# EAGLE board USB Experiment Board (EAGLE 7.6.0)

Size 39 x 45 mm. Coordinates in mm from the lower left corner, seen from the top.
Outline: 0,0 39,0 39,45 0,45 0,0
Copper layers (1*16): Top 0.035mm / dielectric 1.5mm / Bottom 0.035mm
Design rules "default": minimum track width 10mil, minimum drill 24mil, track to track 8mil, track to pad 8mil, pad to pad 8mil, via to via 8mil, smd to smd 8mil, copper to edge 40mil, drill to drill 8mil, minimum pad ring 10mil, minimum via ring 8mil, stop-mask expansion 4mil, vias tented up to drill 0mil, thermal gap 10mil

## Footprints (pad centres in the part's own frame; a part is rotated, then mirrored left to right if it is on the bottom)
1X10-BIG = drill 1.016 pad 1.778 octagon: 1 -11.43,0; 2 -8.89,0; 3 -6.35,0; 4 -3.81,0; 5 -1.27,0; 6 1.27,0; 7 3.81,0; 8 6.35,0; 9 8.89,0; 10 11.43,0
1X02 = drill 1.016 long: 1 -1.27,0; 2 1.27,0
1206 = smd 1.6 x 1.803: A -1.422,0; C 1.422,0
1X04 = drill 1.016 long: 1 -3.81,0; 2 -1.27,0; 3 1.27,0; 4 3.81,0
SIP10 = drill 0.6 long: 1 -11.46,0; 2 -8.92,0; 3 -6.38,0; 4 -3.84,0; 5 -1.3,0; 6 1.24,0; 7 3.78,0; 8 6.32,0; 9 8.86,0; 10 11.4,0
USB-FEMALE-A-PTH = drill 0.9: D+ 5.9,1.3; D- 7.9,1.3; GND 3.4,1.3; VBUS 10.4,1.3 | drill 3: GND@1 13.5,4; GND@2 0.3,4
MOLEX_480371000 = smd 1.2 x 2: 1 3.5,2.6; 2 1,2.6; 3 -1,2.6; 4 -3.5,2.6 | drill 2.5: M1 -5.7,0; M2 5.7,0 | hole 1.1: -2.25,0; 2.25,0

## Placement (x,y rotation side)
BB_1  PINHD-1X10  [1X10-BIG]  19.5,9.5 0 top
BB_2  PINHD-1X10  [1X10-BIG]  19.5,12 0 top
BB_3  PINHD-1X10  [1X10-BIG]  19.5,14.5 0 top
BB_4  PINHD-1X10  [1X10-BIG]  19.5,17 0 top
BB_5  PINHD-1X10  [1X10-BIG]  19.5,19.5 0 top
BB_6  PINHD-1X10  [1X10-BIG]  19.5,22 0 top
BB_7  PINHD-1X10  [1X10-BIG]  19.5,27 0 top
BB_8  PINHD-1X10  [1X10-BIG]  19.5,24.5 0 top
BB_9  PINHD-1X10  [1X10-BIG]  19.5,29.5 0 top
BB_10  PINHD-1X10  [1X10-BIG]  19.5,32 0 top
GND_RAIL_L  PINHD-1X10  [1X10-BIG]  5,21 90 top
GND_RAIL_R  PINHD-1X10  [1X10-BIG]  34,21 90 top
JP_DTA  [1X02]  31.4,3.5 270 top
LED1  [1206]  37.5,42.5 90 top
LED2  [1206]  33.5,42.5 90 top
LED3  [1206]  29.5,42.5 90 top
LED4  [1206]  25.5,42.5 90 top
LED_HDR  [1X04]  31.5,38.5 180 top
POWER  [1206]  21.5,42.5 90 top
RN1  [SIP10]  20,35 0 top
U$1  USB  [USB-FEMALE-A-PTH]  2.5,38 0 top
VCC_RAIL_L  PINHD-1X10  [1X10-BIG]  2,21 90 top
VCC_RAIL_R  PINHD-1X10  [1X10-BIG]  37,21 90 top
X1  USB-A  [MOLEX_480371000]  19.5,2.5 0 top

## Library data of the parts
BB_1-BB_10 GND_RAIL_L GND_RAIL_R LED1-LED4 POWER VCC_RAIL_L VCC_RAIL_R X1 = adafruit
JP_DTA LED_HDR = pinhead
RN1 = resistor-sip
U$1 = STUNTAZ

## Nets
N$1: GND_RAIL_L.1 GND_RAIL_L.2 GND_RAIL_L.3 GND_RAIL_L.4 GND_RAIL_L.5 GND_RAIL_L.6 GND_RAIL_L.7 GND_RAIL_L.8 GND_RAIL_L.9 GND_RAIL_L.10 GND_RAIL_R.1 GND_RAIL_R.2 GND_RAIL_R.3 GND_RAIL_R.4 GND_RAIL_R.5 GND_RAIL_R.6 GND_RAIL_R.7 GND_RAIL_R.8 GND_RAIL_R.9 GND_RAIL_R.10 RN1.1 U$1.GND X1.4
N$2: LED1.C RN1.9
N$3: JP_DTA.1 U$1.D+ X1.3
N$4: JP_DTA.2 U$1.D- X1.2
N$5: LED2.C RN1.8
N$6: LED3.C RN1.7
N$7: LED4.C RN1.6
N$8: LED1.A LED_HDR.1
N$9: LED2.A LED_HDR.2
N$10: LED3.A LED_HDR.3
N$11: LED4.A LED_HDR.4
N$13: POWER.C RN1.5
VCC: POWER.A U$1.VBUS VCC_RAIL_L.1 VCC_RAIL_L.2 VCC_RAIL_L.3 VCC_RAIL_L.4 VCC_RAIL_L.5 VCC_RAIL_L.6 VCC_RAIL_L.7 VCC_RAIL_L.8 VCC_RAIL_L.9 VCC_RAIL_L.10 VCC_RAIL_R.1 VCC_RAIL_R.2 VCC_RAIL_R.3 VCC_RAIL_R.4 VCC_RAIL_R.5 VCC_RAIL_R.6 VCC_RAIL_R.7 VCC_RAIL_R.8 VCC_RAIL_R.9 VCC_RAIL_R.10 X1.1

## Tracks (layer width: path | path; a pad name or v marks a point on that pad's centre or on a via)
N$1  (22 unrouted)
N$2  (1 unrouted)
N$3  (2 unrouted)
N$4  (2 unrouted)
N$5  (1 unrouted)
N$6  (1 unrouted)
N$7  (1 unrouted)
N$8  (1 unrouted)
N$9  (1 unrouted)
N$10  (1 unrouted)
N$11  (1 unrouted)
N$13  (1 unrouted)
VCC  (22 unrouted)

## Text on the board
tNames: + | PD0 | PD1 | PD2 | GND | G | V | D- | VCC > | GND > | GND > | VCC > | D+
bNames: USB Experimentation / Board | Resistor Array In the Bottom | GND | PCBv2 - 2017.05 | MadeInTheUSB.net